# Altium PCB ACEstat.PcbDoc (part 1 of 2)
Units mil, origin at the board's own origin, x right, y up, seen from the top; angles counter-clockwise.
Board outline 1181.1 x 2005.83 mil, 4 copper layers (Top Layer, GROUND, POWER, Bottom Layer), stack 37.677 mil thick; 67 components, 85 nets, 324 pads, 246 vias.
Unrouted connection lines stored in the file: 169.
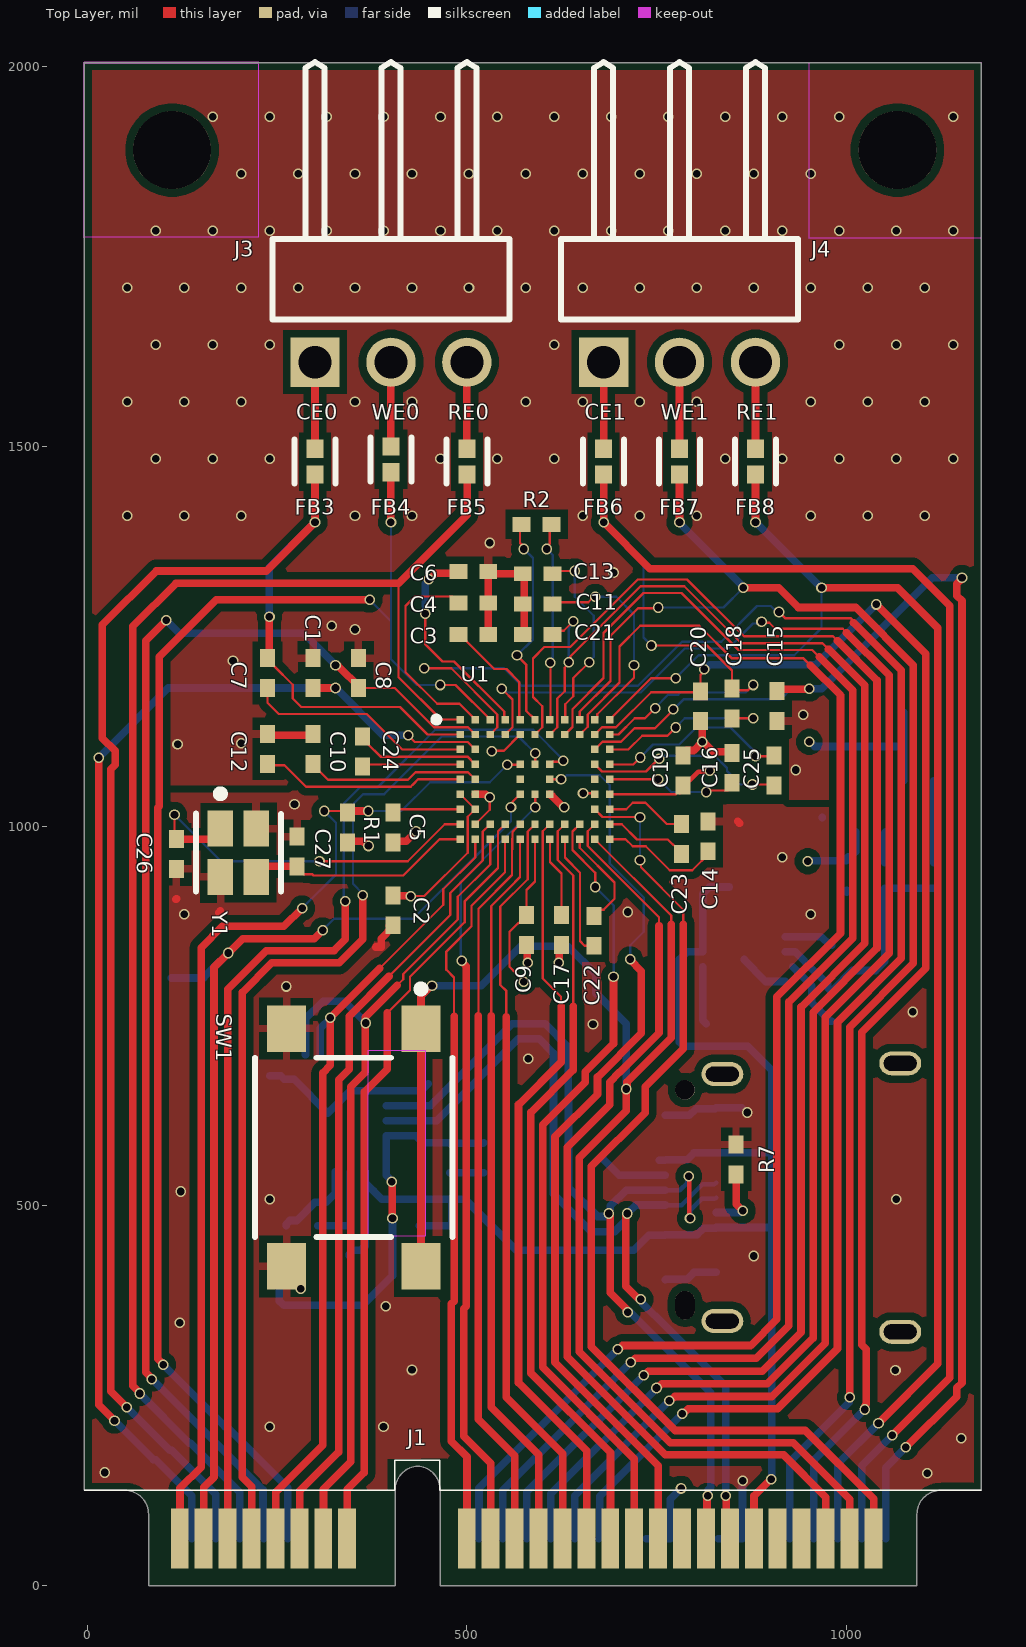
[diagram p0: Top Layer view]
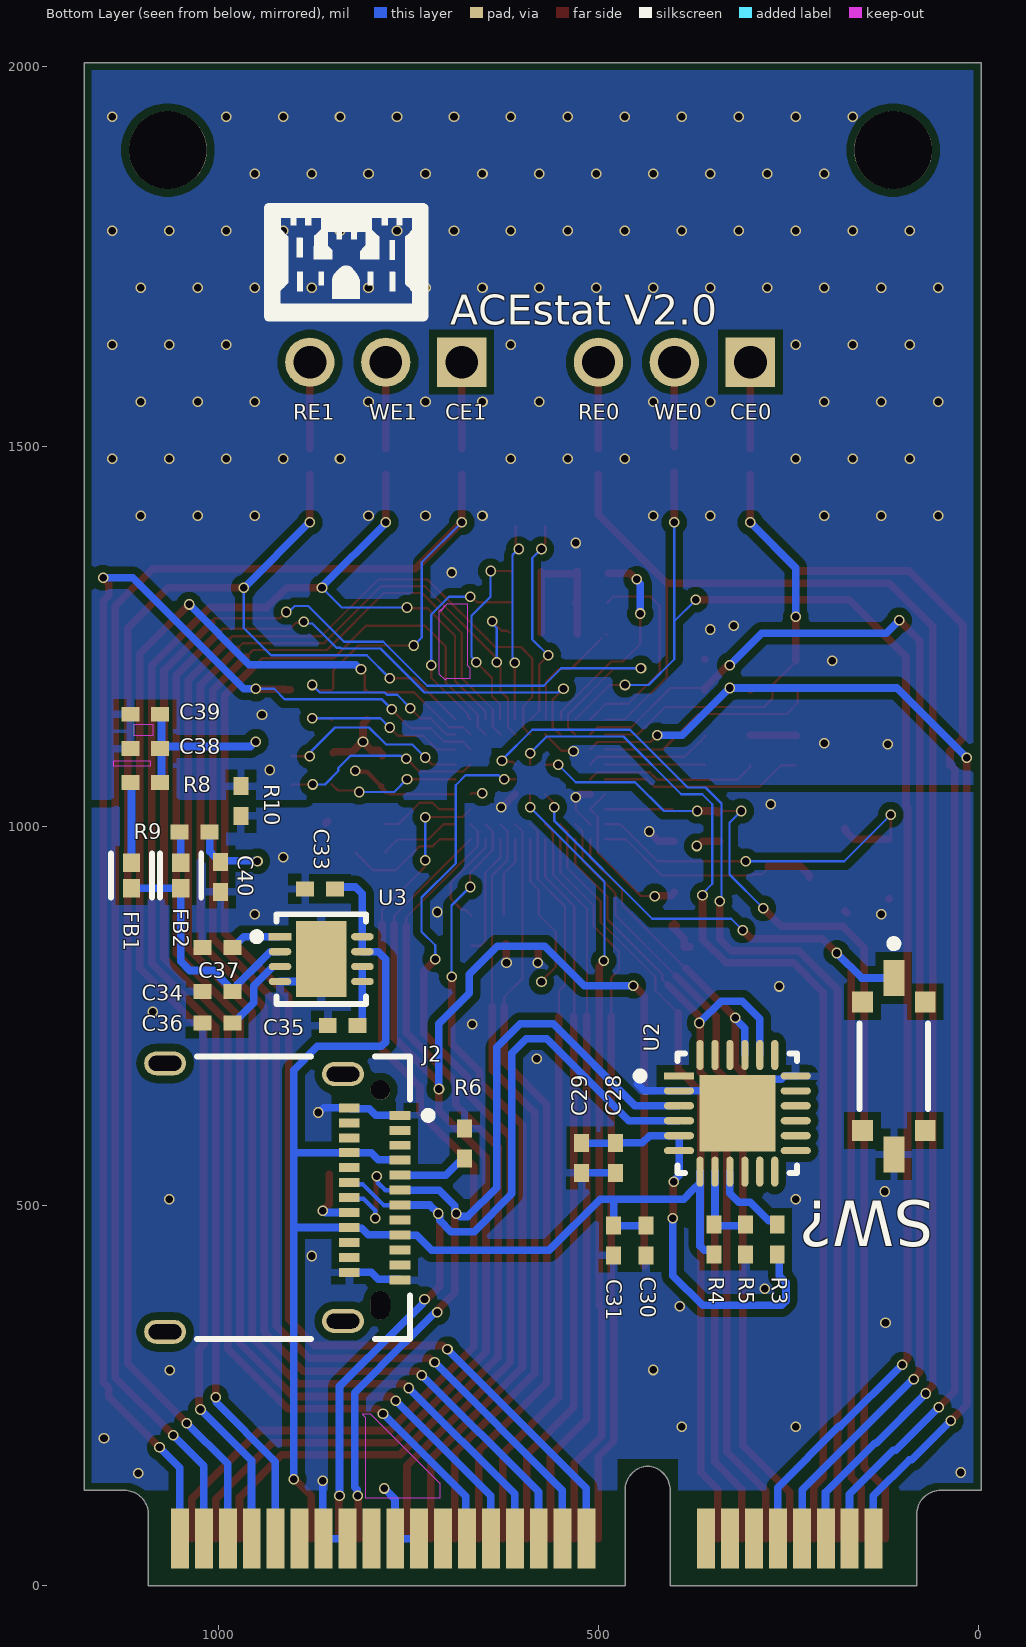
[diagram p1: Bottom Layer view, seen from below]
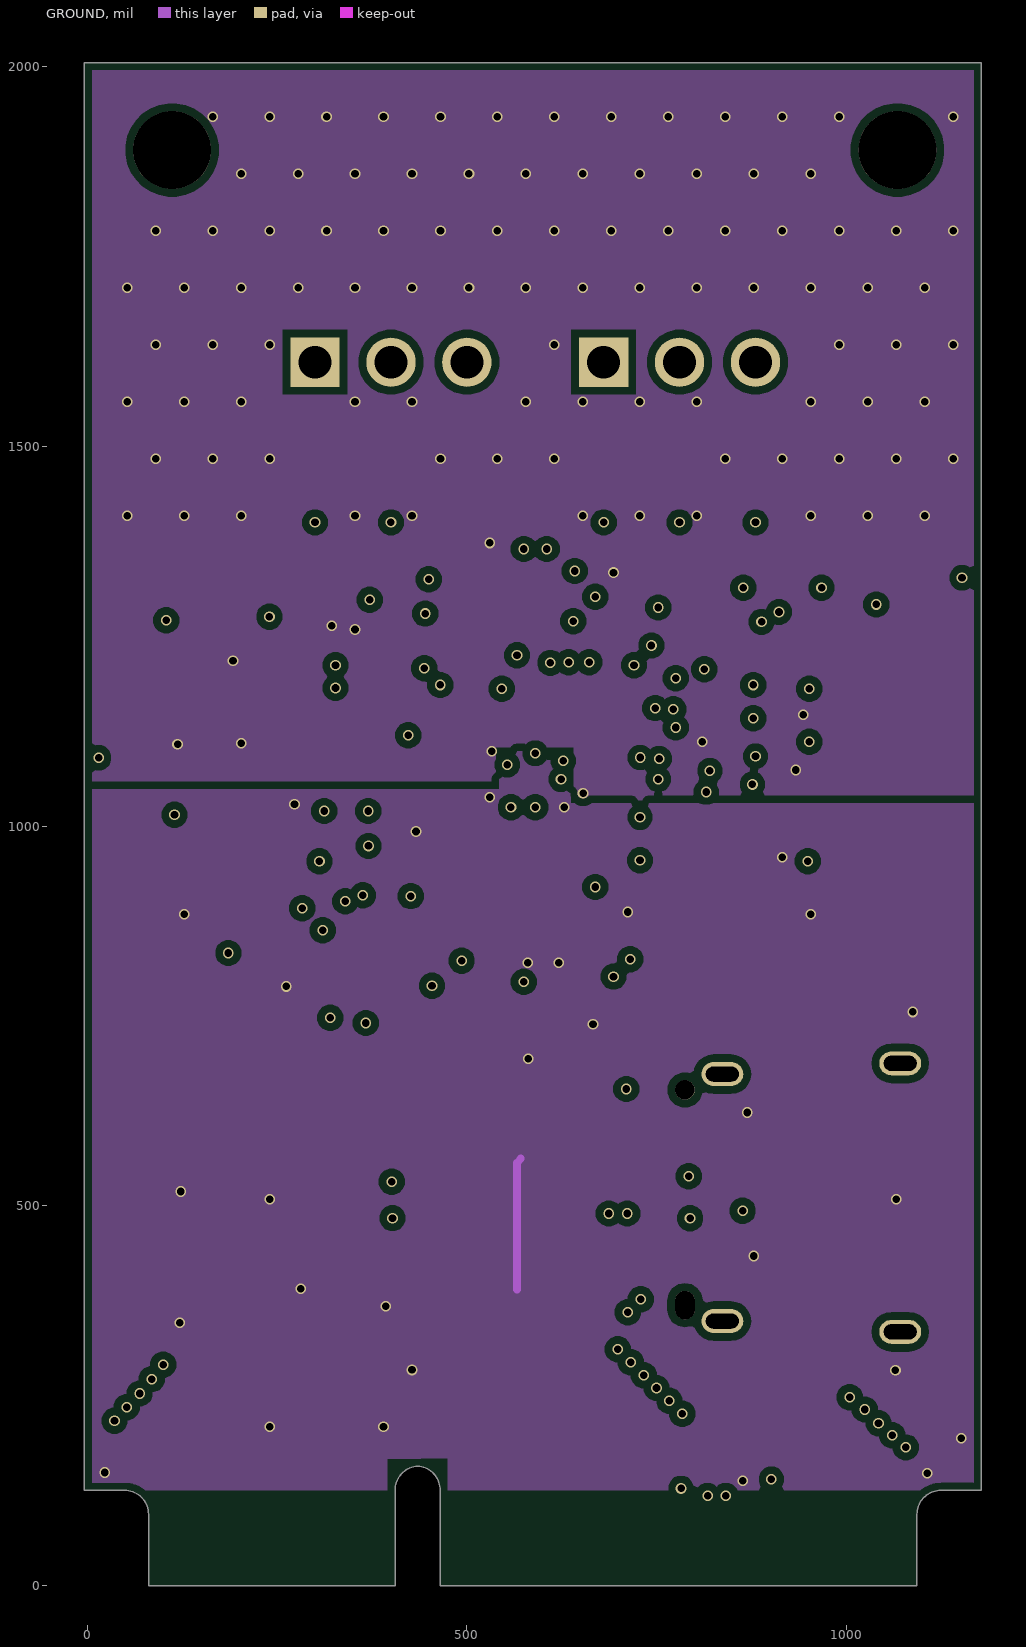
[diagram p2: GROUND]
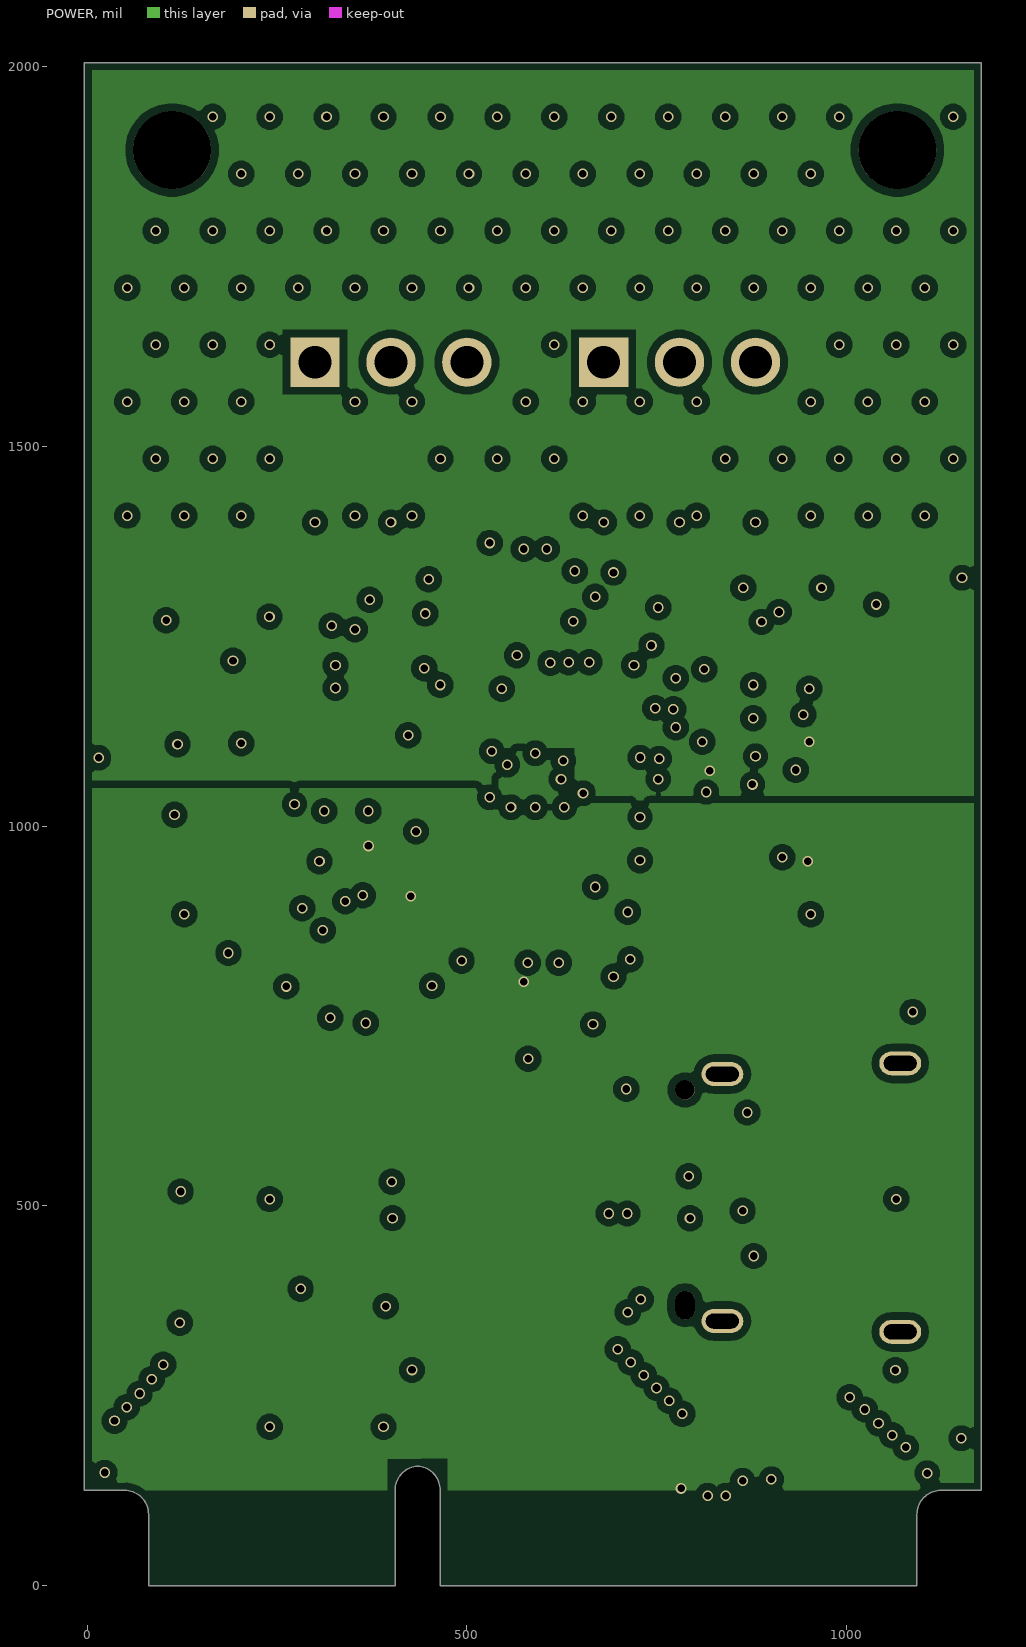
[diagram p3: POWER]

## Layer stack, top to bottom
Top Solder: solder mask 0.4, Solder Resist, Dk 3.5
Top Layer: signal copper 1.5354
Dielectric 2: prepreg 5.5118, PP-006, Dk 4.1
GROUND: signal copper 1.378
Dielectric 1: core 20.8268, FR-4, Dk 4.8
POWER: signal copper 1.378
Dielectric 3: prepreg 5.5118, PP-006, Dk 4.1
Bottom Layer: signal copper 1.5354
Bottom Solder: solder mask 0.4, Solder Resist, Dk 3.5

## Board outline
49.35,125.49 cw(c49.39,94.03) 80.86,94.08 80.86,-0.41 405.66,-0.41 405.65,125.5 405.62,125.5 cw(c436.75,126.14) 435.2,157.25 cw(c433.64,126.15) 464.77,125.5 464.74,125.5 465,-0.41 1092.67,-0.41 1092.67,93.98 cw(c1124.17,93.98) 1124.17,125.48 1177.32,125.5 1177.32,2005.42 -3.79,2005.42 -3.79,125.57

## Design rules (kind name [scope] priority, off if disabled: settings)
BoardOutlineClearance [All] p1: gap=10 ignorepadtopadclearanceinfootprint=FALSE
Clearance ADUCM355BCCZ [InComponent('J1')] p1: gap=1 ignorepadtopadclearanceinfootprint=TRUE
Clearance Keepout [IsKeepOut] p2: gap=0 ignorepadtopadclearanceinfootprint=TRUE
Clearance General [All] p3: gap=10 ignorepadtopadclearanceinfootprint=TRUE except(0: Arc-Hole Track-Hole SMDPad-Hole THPad-Hole Via-Hole Fill-Hole Poly-Hole Region-Hole Text-Hole; 3: Arc-SMDPad Track-SMDPad; 6: Arc-Arc Arc-Track Track-Track)
DiffPairsRouting [All] p1: maxlimit=10 minlimit=3 mostfreqgap=10 toplayer_minwidth=3 toplayer_maxwidth=15 toplayer_prefwidth=10 midlayer1_mingap=10 midlayer1_minwidth=15 midlayer1_maxwidth=15 midlayer1_prefwidth=15 midlayer2_mingap=10 midlayer2_minwidth=15 midlayer2_maxwidth=15 midlayer2_prefwidth=15 bottomlayer_minwidth=3 bottomlayer_maxwidth=15 bottomlayer_prefwidth=10 maxuncoupledlength=500
HoleSize [All] p1: absolutevalues=TRUE maxlimit=110 minlimit=1 maxpercent=80.000 minpercent=20.000
MinimumSolderMaskSliver Within_J1 [InComponent('J1')] p1: minsoldermaskwidth=2
MinimumSolderMaskSliver Within_U1 [InComponent('U1')] p2: minsoldermaskwidth=2
MinimumSolderMaskSliver Within_J2 [InComponent('J2')] p3: minsoldermaskwidth=2
MinimumSolderMaskSliver Within_U3 [InComponent('U3')] p4: minsoldermaskwidth=2
MinimumSolderMaskSliver Within_U2 [InComponent('U2')] p5: minsoldermaskwidth=2
MinimumSolderMaskSliver [All] p6: minsoldermaskwidth=8
PasteMaskExpansion isEdgeConnector_Paste [HasFootprint('MPCIE_CARD_EDGE')] p1: expansion=-99999 usepaste=FALSE
PasteMaskExpansion IsPad_Paste [IsPad] p2: expansion=0
PasteMaskExpansion [All] p3: expansion=0
PlaneClearance "Under U1" [InComponent('U1')] p1: clearance=0
PlaneClearance [All] p2: clearance=20
PlaneConnect [All] p1: pad.planeconnectstyle=Relief pad.reliefexpansion=20 pad.reliefentries=4 pad.reliefconductorwidth=10 pad.reliefairgap=10 via.planeconnectstyle=Direct via.reliefexpansion=20 via.reliefentries=4 via.reliefconductorwidth=10 via.reliefairgap=10
PolygonConnect [All] p1: thpad.connectstyle=Direct thpad.reliefconductorwidth=10 thpad.reliefentries=4 thpad.polygonreliefangle="90 Angle" thpad.airgapwidth=10 smdpad.connectstyle=Relief smdpad.reliefconductorwidth=10 smdpad.reliefentries=4 smdpad.polygonreliefangle="90 Angle" smdpad.airgapwidth=10 via.connectstyle=Direct via.reliefconductorwidth=10 via.reliefentries=4 via.polygonreliefangle="90 Angle" via.airgapwidth=10
RoutingVias [All] p1: holewidth=10 width=14 viastyle="Through Hole" minholewidth=10 minwidth=10 maxholewidth=20 maxwidth=20
SilkToSolderMaskClearance [IsPad] p1: minsilkscreentomaskgap=3 clearancetoexposedcopper=TRUE
SolderMaskExpansion IsPad_SolderMask [IsPad] p1: expansion=0 istentingtop=FALSE
SolderMaskExpansion [All] p2: expansion=4 istentingtop=TRUE useseparateexpansions=TRUE expansionbottom=4 istentingbottom=TRUE
UnRoutedNet [All] p1: checkbadconnections=TRUE
Width [All] p1: maxlimit=10 minlimit=3 preferedwidth=10 toplayer_prefwidth=6 midlayer1_minwidth=10 midlayer2_minwidth=10 bottomlayer_prefwidth=6 minimp=50.000000 maximp=50.000000 favimp=50.000000
22 further rules are at their usual default settings.

## Classes and differential pairs
component class USB: C28 C29 C30 C31 J2 R3 R4 R5 R6 R7 U2
component class Power: C33 C34 C35 C36 C37 C38 C39 C40 FB1 FB2 R8 R9 R10 U3
component class "Chan 1": FB6 FB7 FB8 J4
component class "Chan 0": FB3 FB4 FB5 J3
component class acestat_355: C1 C2 C3 C4 C5 C6 C7 C8 C9 C10 C11 C12 C13 C14 C15 C16 C17 C18 C19 C20 C21 C22 C23 C24 C25 C26 C27 J1 R1 R2 SW1 SW? U1 Y1
differential pair USBD: +USBD_P -USBD_N

## Components (designator, comment, footprint, x,y, rotation, side; value= is the part's Value field where it differs from the comment)
C1 "C0402C104K4RAC7867" "0402 SMD"#1 300,1200 r270 top value=0.1uF
C2 "C0402C104K4RAC7867" "0402 SMD"#1 400,891 r90 top value=0.1uF
C3 "C0402C475M7PAC7867" "0402 SMD"#1 506.72,1250 r180 top value=4.7uF
C4 "C0402C104K4RAC7867" "0402 SMD"#1 506.72,1291.51 r180 top value=0.1uF
C5 "C0402C474K9PAC7867" "0402 SMD"#1 400,1000 r90 top value=0.47uF
C6 "CL05A475KQ5NRNC" "0402 SMD"#1 506.72,1333.01 r180 top value=4.7uF
C7 "C0402C104K4RAC7867" "0402 SMD"#1 240,1200 r270 top value=0.1uF
C8 "C0402C104K4RAC7867" "0402 SMD"#1 360,1200 r270 top value=0.1uF
C9 "C0402C104K4RAC7867" "0402 SMD"#2 576,865 r90 top value=0.1uF
C10 "C0402C474K9PAC7867" "0402 SMD"#1 300,1100 r270 top value=0.47uF
C11 "C0402C104K4RAC7867" "0402 SMD"#1 595,1295 r0 top value=0.1uF
C12 "C0402C474K9PAC7867" "0402 SMD"#1 240,1100 r270 top value=0.47uF
C13 "CL05A475KQ5NRNC" "0402 SMD"#1 595,1335 r0 top value=4.7uF
C14 "C0402C474K9PAC7867" "0402 SMD"#1 820,985 r270 top value=0.47uF
C15 "C0402C104K4RAC7867" "0402 SMD"#1 906,1160 r90 top value=0.1uF
C16 "C0402C474K9PAC7867" "0402 SMD"#1 851.64,1075.19 r270 top value=0.47uF
C17 "C0402C474K9PAC7867" "0402 SMD"#1 622,865 r90 top value=0.47uF
C18 "C0402C104K4RAC7867" "0402 SMD"#1 851.64,1160 r270 top value=0.1uF
C19 "C0402C104K4RAC7867" "0402 SMD"#1 787,1071.4 r270 top value=0.1uF
C20 "C0402C104K4RAC7867" "0402 SMD"#1 805,1159.69 r90 top value=0.1uF
C21 "C0402C221K5RAC7867" "0402 SMD"#1 595,1255 r0 top value=220pF
C22 "C0402C104K4RAC7867" "0402 SMD"#1 665,864 r90 top value=0.1uF
C23 "C0402C104K4RAC7867" "0402 SMD"#1 780,985 r90 top value=0.1uF
C24 "C0402C104K4RAC7867" "0402 SMD"#1 360,1100 r90 top value=0.1uF
C25 "C0402C104K4RAC7867" "0402 SMD"#1 902,1075 r90 top value=0.1uF
C26 "CBR04C709B5GAC" "0402 SMD"#1 115,965 r90 top value=7pF
C27 "CBR04C709B5GAC" "0402 SMD"#1 279,965 r270 top value=7pF
C28 "C0402C104K4RAC7867" "0402 SMD"#1 480,565 r90 bottom value=0.1uF
C29 "CL05A475KQ5NRNC" "0402 SMD"#1 524.87,565 r90 bottom value=4.7uF
C30 "C0402C104K4RAC7867" "0402 SMD"#1 440,456.01 r90 bottom value=0.1uF
C31 "CL05A475KQ5NRNC" "0402 SMD"#1 482.51,456.01 r90 bottom value=4.7uF
C33 "C0402C106M9PAC7867" "0402 SMD"#1 865,920 r180 bottom value=10uF
C34 "C0402C106M9PAC7867" "0402 SMD"#1 1000,784.88 r180 bottom value=10uF
C35 "C0402C105K8PAC7867" "0402 SMD"#1 835,740 r180 bottom value=1uF
C36 "C0402C105K8PAC7867" "0402 SMD"#1 1000,743.37 r180 bottom value=1uF
C37 "C0402C106M9PAC7867" "0402 SMD"#1 1000,843.01 r180 bottom value=10uF
C38 "C0402C104K4RAC7867" "0402 SMD"#1 1095,1105 r180 bottom value=0.1uF
C39 "C0402C106M9PAC7867" "0402 SMD"#1 1095,1150 r180 bottom value=10uF
C40 "C0402C104K4RAC7867" "0402 SMD"#1 1000,935 r90 bottom value=0.1uF
FB1 "BLM15PD600SN1D" FP-BLM15-0_05-d0_7-IPC_B#1 1115,935 r90 bottom
FB2 "BLM15PD600SN1D" FP-BLM15-0_05-d0_7-IPC_B#1 1050,935 r90 bottom
FB3 "BLM15PD600SN1D" FP-BLM15-0_05-d0_7-IPC_B#2 300,1480 r90 top
FB4 "BLM15PD600SN1D" FP-BLM15-0_05-d0_7-IPC_B#2 400,1483.13 r90 top
FB5 "BLM15PD600SN1D" FP-BLM15-0_05-d0_7-IPC_B#2 500,1480 r90 top
FB6 "BLM15PD600SN1D" FP-BLM15-0_05-d0_7-IPC_B#2 680,1480 r90 top
FB7 "BLM15PD600SN1D" FP-BLM15-0_05-d0_7-IPC_B#2 780,1480 r90 top
FB8 "BLM15PD600SN1D" FP-BLM15-0_05-d0_7-IPC_B#2 880,1480 r90 top
J1 "mPCIE Edge Connector" MPCIE_CARD_EDGE 80.53,-0.01 r0 top
J2 "12401610E4#2A" FP-12401610E4#2A-MFG 959,511 r270 bottom
J3 "61300311021" 61300311021 400,1720 r180 top
J4 "61300311021" 61300311021 780,1720 r180 top
R1 "RC0402FR-07100KL" "0402 SMD"#1 340,1000 r90 top value=100k
R2 "RN73C1E200RBTD" "0402 SMD"#1 590,1395 r180 top value=200
R3 "RC0402FR-071KL" "0402 SMD"#1 261.99,454.27 r270 bottom value=1k
R4 "RC0402FR-0720KL" "0402 SMD"#1 345,454.27 r270 bottom value=20k
R5 "RC0402FR-0747KL" "0402 SMD"#1 303.49,454.27 r270 bottom value=47k
R6 "RC0402FR-075K1L" "0402 SMD"#1 679,584 r90 bottom value=5.1k
R7 "RC0402FR-075K1L" "0402 SMD"#1 852,563 r90 top value=5.1k
R8 "SG73P1EWTTP2R20F" "0402 SMD"#1 1095,1060 r180 bottom value=2.2
R9 "SG73P1EWTTP2R20F" "0402 SMD"#1 1030,995 r180 bottom value=2.2
R10 "RC0402FR-070RL" "0402 SMD"#1 968,1031.32 r270 bottom value=0
SW1 "B3S-1000" OMRON-B3S-1000-4_V 351,577 r270 top
SW? "CVS-01TB" FP-CVS-01TB-MFG 111,684 r180 bottom
U1 "ADUCM355BCCZ" ADUCM355BCCZ 491.26,1140.43 r0 top
U2 "CP2102N-A02-GQFN24" FP-CP2102N-A02-GQFN24R-IPC_A 317,622 r180 bottom
U3 "ADM7154ACPZ-3.3-R7" FP-CP-8-21-IPC_C 865,825 r180 bottom
Y1 "ABM10W-32.0000MHZ-7-D1X-T3" FP-ABM10W-MFG 199,965 r270 top

## Footprints (in the part's own frame and the unit in brackets; to place one, negate y for a bottom-side part, rotate by r counter-clockwise, add the part's x,y. Pads: shape width x height; smd on the part's side, far side on the other; paste and mask are expansions set on the pad)
"0402 SMD"#1 [mm] "Footprint for 0402 SMD components"
  rect 0.6x0.5 smd: 1(-0.544,-0.065) 2(0.456,-0.065)
  body extent -0.59,-0.37 0.51,0.23, height 1.3
"0402 SMD"#2 [mm] "Footprint for 0402 SMD components"
  rect 0.6x0.5 smd paste+0 mask-0.6: 1(-0.544,-0.065)
  rect 0.6x0.5 smd mask+0.025: 2(0.456,-0.065)
  body extent -0.59,-0.37 0.51,0.23, height 1.3
61300311021 [mm] "Pin Header, pitch 2.54 mm, THT, Angled, single row, 3p"
  rect 1.65x1.65 hole 1.1: 1(2.54,2.77)
  round 1.65 hole 1.1: 2(0,2.77) 3(-2.54,2.77)
  silkscreen extent -3.96,-7.27 3.96,1.35, body extent -3.81,-7.27 3.81,3.09, height 2.58
ADUCM355BCCZ [mm]
  rect 0.25x0.25 smd paste+0 mask+0.05: A1(0,0) A2(0.5,0) A3(1,0) A4(1.5,0) A5(2,0) A6(2.5,0) A7(3,0) A8(3.5,0) A9(4,0) A10(4.5,0) A11(5,0) B1(0,-0.5) B2(0.5,-0.5) B3(1,-0.5) B4(1.5,-0.5) B5(2,-0.5) B6(2.5,-0.5) B7(3,-0.5) B8(3.5,-0.5) B9(4,-0.5) B10(4.5,-0.5) B11(5,-0.5) C1(0,-1) C2(0.5,-1) C10(4.5,-1) C11(5,-1) D1(0,-1.5) D2(0.5,-1.5) D5(2,-1.5) D6(2.5,-1.5) D7(3,-1.5) D10(4.5,-1.5) D11(5,-1.5) E1(0,-2) E2(0.5,-2) E5(2,-2) E7(3,-2) E10(4.5,-2) E11(5,-2) F1(0,-2.5) F2(0.5,-2.5) F5(2,-2.5) F6(2.5,-2.5) F7(3,-2.5) F10(4.5,-2.5) F11(5,-2.5) G1(0,-3) G2(0.5,-3) G10(4.5,-3) G11(5,-3) H1(0,-3.5) H2(0.5,-3.5) H3(1,-3.5) H4(1.5,-3.5) H5(2,-3.5) H6(2.5,-3.5) H7(3,-3.5) H8(3.5,-3.5) H9(4,-3.5) H10(4.5,-3.5) H11(5,-3.5) J1(0,-4) J2(0.5,-4) J3(1,-4) J4(1.5,-4) J5(2,-4) J6(2.5,-4) J7(3,-4) J8(3.5,-4) J9(4,-4) J10(4.5,-4) J11(5,-4)
  silkscreen extent -0.9,-0.1 -0.7,0.1, body extent -0.5,-4.5 5.5,0.5, height 0.25
FP-12401610E4#2A-MFG [mm]
  rrect100% 0.8x1.4 hole 1.1 slot 0.5 at 0 deg paste-1000 mask+0: 1(-4.13,3.115) 2(4.13,3.115) 3(-4.49,-2.835) 4(4.49,-2.835)
  rect 0.3x0.7 smd paste+0 mask+0: A1(-2.75,5.025) A2(-2.25,5.025) A3(-1.75,5.025) A4(-1.25,5.025) A5(-0.75,5.025) A6(-0.25,5.025) A7(0.25,5.025) A8(0.75,5.025) A9(1.25,5.025) A10(1.75,5.025) A11(2.25,5.025) A12(2.75,5.025) B1(2.5,3.325) B2(2,3.325) B3(1.5,3.325) B4(1,3.325) B5(0.5,3.325) B6(0,3.325) B7(-0.5,3.325) B8(-1,3.325) B9(-1.5,3.325) B10(-2,3.325) B11(-2.5,3.325) B12(-3,3.325)
  round 0.65 hole 0.65 unplated paste-1000 mask+0: ""(-3.6,4.365)
  rrect100% 0.95x0.65 hole 0.65 slot 0.95 at 0 deg unplated paste-1000 mask+0: ""(3.6,4.365)
  silkscreen extent -4.72,-1.76 4.72,6.09, body extent -4.6,-5.23 4.6,5.33, height 3.43
FP-ABM10W-MFG [mm]
  rect 1.2x0.85 smd: 1(-0.813,-0.6) 2(0.813,-0.6) 3(0.813,0.6) 4(-0.813,0.6)
  silkscreen extent -2.1,-1.42 1.3,1.43, body extent -1.51,-1.15 1.51,1.15, height 0.25
FP-BLM15-0_05-d0_7-IPC_B#1 [mil]
  rect 24.23x22.54 smd paste+0 mask+0: 1(-16.87,0) 2(16.87,0)
  silkscreen extent -29,-27 29,27, body extent -20,-10 20,10, height 22
FP-BLM15-0_05-d0_7-IPC_B#2 [mil]
  rect 24.23x22.54 smd paste+0: 1(-16.87,0) 2(16.87,0)
  silkscreen extent -29,-27 29,27, body extent -35,-17 35,17, height 10
FP-CP2102N-A02-GQFN24R-IPC_A [mm]
  rect 1.01x0.239 smd paste+0 mask+0: 1(-1.951,1.25)
  rrect100% 1.01x0.239 smd paste+0 mask+0: 2(-1.951,0.75) 3(-1.951,0.25) 4(-1.951,-0.25) 5(-1.951,-0.75) 6(-1.951,-1.25) 13(1.951,-1.25) 14(1.951,-0.75) 15(1.951,-0.25) 16(1.951,0.25) 17(1.951,0.75) 18(1.951,1.25)
  rrect100% 0.239x1.01 smd paste+0 mask+0: 7(-1.25,-1.951) 8(-0.75,-1.951) 9(-0.25,-1.951) 10(0.25,-1.951) 11(0.75,-1.951) 12(1.25,-1.951) 19(1.25,1.951) 20(0.75,1.951) 21(0.25,1.951) 22(-0.25,1.951) 23(-0.75,1.951) 24(-1.25,1.951)
  rect 2.55x2.55 smd paste-1000 mask+0: 25(0,0)
  silkscreen extent -3.38,-2 2,2, body extent -2,-2 2,2, height 0.8
FP-CP-8-21-IPC_C [mm]
  rect 0.756x0.242 smd paste+0 mask+0: 1(-1.378,0.75)
  rrect100% 0.756x0.242 smd paste+0 mask+0: 2(-1.378,0.25) 3(-1.378,-0.25) 4(-1.378,-0.75) 5(1.378,-0.75) 6(1.378,-0.25) 7(1.378,0.25) 8(1.378,0.75)
  rect 1.7x2.54 smd paste-1000 mask+0: 9(0,0)
  silkscreen extent -2.28,-1.5 1.5,1.5, body extent -1.5,-1.5 1.5,1.5, height 0.8
FP-CVS-01TB-MFG [mm]
  rect 0.7x1.2 smd paste+0 mask+0: 1(0,2.95) 2(0,-2.95)
  rect 0.7x0.7 smd paste+0 mask+0: 3(-1.05,2.15) 4(1.05,2.15) 5(-1.05,-2.15) 6(1.05,-2.15)
  silkscreen extent -1.15,-1.43 1.15,4.22, body extent -1,-3.05 1,3.05, height 1.75
MPCIE_CARD_EDGE [mm] "Based on https://www.te.com/commerce/DocumentDelivery/DDEController?Action=srchrtrv&DocNm=1775838&DocType=Customer+Drawing&DocLang=English"
  rect 0.6x2 smd: 1(1.05,1.575) 3(1.85,1.575) 5(2.65,1.575) 7(3.45,1.575) 9(4.25,1.575) 11(5.05,1.575) 13(5.85,1.575) 15(6.65,1.575) 17(10.65,1.575) 19(11.45,1.575) 21(12.25,1.575) 23(13.05,1.575) 25(13.85,1.575) 27(14.65,1.575) 29(15.45,1.575) 31(16.25,1.575) 33(17.05,1.575) 35(17.85,1.575) 37(18.65,1.575) 39(19.45,1.575) 41(20.25,1.575) 43(21.05,1.575) 45(21.85,1.575) 47(22.65,1.575) 49(23.45,1.575) 51(24.25,1.575)
  rect 0.6x2 smd far side: 2(1.45,1.575) 4(2.25,1.575) 6(3.05,1.575) 8(3.85,1.575) 10(4.65,1.575) 12(5.45,1.575) 14(6.25,1.575) 16(7.05,1.575) 18(11.05,1.575) 20(11.85,1.575) 22(12.65,1.575) 24(13.45,1.575) 26(14.25,1.575) 28(15.05,1.575) 30(15.85,1.575) 32(16.65,1.575) 34(17.45,1.575) 36(18.25,1.575) 38(19.05,1.575) 40(19.85,1.575) 42(20.65,1.575) 44(21.45,1.575) 46(22.25,1.575) 48(23.05,1.575) 50(23.85,1.575) 52(24.65,1.575)
  silkscreen extent -2.15,3.2 27.85,4.2
OMRON-B3S-1000-4_V [mm] "SMD, 4-Leads, Body 6.6x6mm"
  rect 1.55x1.3 smd: 1(-3.975,2.25) 2(3.975,2.25) 4(3.975,-2.25)
  rect 1.55x1.3 smd mask+0: 3(-3.975,-2.25)
  silkscreen extent -5.42,-3.3 3,3.3, body extent -4.5,-3.3 4.5,3.3, height 4.4

## Part data
C1 C2 C4 C7 C8 C9 C11 C15 C18 C19 C20 C22 C23 C24 C25 C28 C30 C38 C40: "0.1 µF ±10% 16V Ceramic Capacitor X7R 0402 (1005 Metric) Kemet"
C3: "4.7 µF ±20% 4V Ceramic Capacitor X5R 0402 (1005 Metric) (1005 Metric) Kemet"
C5 C10 C12 C14 C16 C17: "0.47 µF ±10% 6.3V Ceramic Capacitor X5R 0402 (1005 Metric) Kemet"
C6 C13 C29 C31: "4.7 µF ±10% 6.3V Ceramic Capacitor X5R 0402 (1005 Metric) Samsung"
C21: "220 pF ±10% 50V Ceramic Capacitor X7R 0402 (1005 Metric)Kemet"
C26 C27: "7 pF ±0.1pF 50V Ceramic Capacitor C0G, NP0 0402 (1005 Metric) Kemet"
C33 C34 C37 C39: "10 µF ±20% 6.3V Ceramic Capacitor X5R 0402 (1005 Metric) (1005 Metric) Kemet"
C35 C36: "1 µF ±10% 10V Ceramic Capacitor X5R 0402 (1005 Metric)"
FB1 FB2 FB3 FB4 FB5 FB6 FB7 FB8: library part CMP-0686-00129-3, "Chip Ferrite Bead, 0402, 60Ω @ 100MHz, 0.06Ω, 25%, 1.7A", Case Code (Imperial)=0402, Case Code (Metric)=1005, Current Rating=1.7A, DC Resistance (DCR)=60mR, DC Resistance-Max=60MR, Max Operating Temperature=125°C, Min Operating Temperature=-55°C, Package Quantity=1, Test Frequency=100MHz, Tolerance=25%, Case/Package=0402, Core Material=Ferrite, DC Current=1.7A, Depth=0.55mm, Height=0.5mm, Impedance=60R, Lead Free="Lead Free", Length=1mm, Material=Steel, Max Current Rating=1.7A, Max DC Current=1.7A, Military Standard=Not, Number of Circuits=1, Number of Lines=1, Number of Pins=2, Packaging="Tape and Reel", Radiation Hardening=No, REACH SVHC="No SVHC", RoHS Compliant=Yes, Series=BLM15PD, Termination=SMD/SMT, Width=0.5mm
J1: library part mPCIE_Edge
J2: library part CMP-02355-000003-1, "CONN RCP USB3.1 TYPEC 24P SMD RA", Connector Type=USB, Gender=Receptacle, Mount="Surface Mount", Number of Contacts=24, Number of Pins=24, Packaging="Cut Tape"
J3 J4: library part CMP-1502-01061-1, "THT Angled Pin Header WR-PHD, Pitch 2.54 mm, Single Row, 3 pins", Contact Resistance=20mOhm, Manufacturer="Wurth Elektronik", Operating Temperature=-40to105degC, Rated Current=3A, Withstanding Voltage=500VAC, Working Voltage=250VAC, Datasheet URL=https://katalog.we-online.de/em/datasheet/6130xx11021.pdf, Gender=Male, Manufacturer URL=http://www.we-online.de, Mounting Technology=THT, Orientation=Angled, Package Reference=61300311021, Packaging=Bag, Part Number=61300311021, Pin Number=3, Pitch=2.54mm, Publisher=WurthElektronik, Row Number=Single
R1: "100 kOhms ±1% 0.063W, 1/16W Chip Resistor 0402 (1005 Metric) Moisture Resistant Thick Film"
R2: "200 Ohms ±0.1% 0.063W, 1/16W Chip Resistor 0402 (1005 Metric) Thin Film"
R3: "1 kOhms ±1% 0.063W, 1/16W Chip Resistor 0402 (1005 Metric) Moisture Resistant Thick Film"
R4: "20 kOhms ±1% 0.063W, 1/16W Chip Resistor 0402 (1005 Metric) Moisture Resistant Thick Film"
R5: "47 kOhms ±1% 0.063W, 1/16W Chip Resistor 0402 (1005 Metric) Moisture Resistant Thick Film"
R6 R7: "5.1 kOhms ±1% 0.063W, 1/16W Chip Resistor 0402 (1005 Metric) Moisture Resistant Thick Film"
R8 R9: "2.2 Ohms ±1% 0.25W, 1/4W Chip Resistor 0402 (1005 Metric) Automotive AEC-Q200, Pulse Withstanding Thick Film"
R10: "0 Ohms Jumper 0.063W, 1/16W Chip Resistor 0402 (1005 Metric) Moisture Resistant Thick Film"
SW1: library part CMP-1677-00001-4, "Sealed Tactile Switch, SPST-NO, 3 to 24 V, -25 to 70 degC, 4-Pin SMD, RoHS, Bulk", Current Rating="50 mA", Manufacturer=Omron, Max Operating Temperature="70 degC", Min Operating Temperature="-25 degC", Package Quantity=1500, Voltage Rating="24 V", ComponentLink1Description="Manufacturer URL", ComponentLink1URL=http://www.omron.com/, ComponentLink2Description=Datasheet, ComponentLink2URL=http://www.omron.com/ecb/products/pdf/en-b3s.pdf, Contact Plating=Silver, DatasheetVersion=10/2014, Height="4.3 mm", Length="6.6 mm", Mount="Surface Mount", Mounting Technology="Surface Mount", PackageDescription="4-Pin Surface Mount Device, Body 6.6 x 6 mm", PackageReference=B3S-1000, Packaging=Bulk, REACH SVHC="No SVHC", RoHSCompliant=true
SW?: library part CMP-011-00013-1, "Switch Slide OFF ON SPST Recessed Slide 0.1A 24VDC Gull Wing SMD Embossed T/R"
U1: "ARM® Cortex®-M3 ADuCM Microcontroller IC 32-Bit 26MHz 128KB _128K x 8_ FLASH 72-LGA _6x6_", Package="VFLGA-72 Analog Devices Inc.", Supplier Part Number 1=505-ADUCM355BCCZ-ND, Digi-Key_Part_Number=ADUCM355BCCZ-RL7-ND, Digi-Key_Purchase_URL=https://www.digikey.com/product-detail/en/analog-devices-inc/ADUCM355BCCZ-RL7/ADUCM355BCCZ-RL7-ND/9996949?utm_source=snapeda&utm_medium=aggregator&utm_campaign=symbol, MF="Analog Devices", MP=ADUCM355BCCZ, SnapEDA_Link=https://www.snapeda.com/parts/ADUCM355BCCZ/Analog%20Devices%20Inc./view-part/3616453/?ref=snap, Supplier 1=Digi-Key
U2: library part CP2102N, "IC USB TO UART BRIDGE QFN24"
U3: library part CMP-09138-000115-1, "IC REG LINEAR 3.3V 600MA 8LFCSP", Dropout Voltage=120mV, Max Input Voltage=5.5V, Max Operating Temperature=125°C, Max Output Current=600mA, Min Current Limit=700mA, Min Input Voltage=2.3V, Min Operating Temperature=-40°C, Nominal Output Voltage=3.3V, Quiescent Current=4mA, Accuracy=0.5%, Contact Plating=Tin, Lead Free="Contains Lead", Mount="Surface Mount", Number of Outputs=1, Number of Pins=8, Number of Regulators=1, Output Current=600mA, Output Type=Fixed, Output Voltage=3.3V, Packaging="Cut Tape", Polarity=Positive, REACH SVHC="No SVHC", RoHS Compliant=Yes
Y1: library part CMP-27762-001052-1, "Crystal 32MHz ±10ppm 7pF SMD-4 2.5mm x 2mm"

## Free pads (board coordinates)
  round 102.36 hole 102.36 unplated: Mount(111.85,1890.35) Mount(1066.93,1890.35)

## Via types
v1: diameter 14, hole 10, Top Layer to Bottom Layer, tented both sides, 246 vias

## Nets (pads, with @x,y where several pads share a name; then routed paths per layer and width w, separated by ;. In a path a pad name is that pad's centre, name@x,y a point inside that pad or via, vN(x,y) a via of type N, cw(c..) or ccw(c..) an arc to the next point about the centre after c; other vN are vias at no path point)
3V3: C34.2 FB1.1 FB2.1 U3.2 | length 331.6
  Bottom Layer w10: U3.2@919.25,834.84 919.48,834.62 932.08,834.62 958.14,808.56 958.6,808.56 975.24,791.92 975.24,787.15 980.08,782.31 C34.2@982.05,782.31 ; C34.2@982.28,784.88 1007.41,810 1038,810 1050,822 FB2.1@1050,918.13 FB1.1@1115,918.13
5VUSB: C30.2 C31.2 C33.2 J1.41 J2.A4 J2.A9 J2.B4 J2.B9 R4.2 U2.7 U3.7 U3.8 | length 1961.2
  Top Layer w10: J1.41@878.1,62.01 878.1,118.1 900,140 v1(901,140)
  Bottom Layer w10: R4.2@345,434.59 345,436.55 349.84,441.4 360.35,441.4 366.21,447.25 U2.7@366.21,530.59 ; U2.7@366.21,545.18 U2.7@366.21,530.59 ; C30.2@437.43,473.96 C31.2@479.94,473.96 479.94,508.94 480,509 ; J2.A4@753.29,560.21 J2.A4@761.17,560.21 761.85,560.9 789.95,560.9 799.1,570.06 J2.B9@828.09,570.06 901.37,570.06 ; J2.B4@827.41,470.94 827.19,470.72 811.91,470.72 802.97,461.79 J2.A9@761.17,461.79 760.91,461.53 739.53,461.53 719.43,441.43 565.07,441.43 497.5,509 480,509 ; J2.B4@828.09,471.63 900.37,471.63 901.37,470.63 ; C33.2@845.31,920 820,920 810.75,910.75 U3.8@810.75,854.53 U3.7@810.75,834.84 789.84,834.84 780,825 780,715.86 785.86,710 870,710 901.37,678.63 901.37,570.06 ; v1(901,140) 901.37,140.37 901.37,471.63 901.37,570.06 ; U2.7@366.21,530.59 377,519.81 387.81,509 480,509
ADC_VBIAS_CAP: C16.2 U1.E11 | length 174.8
  Top Layer w3: U1.E11@688.11,1061.69 688.43,1062 v1(752,1062) ; v1(815,1045) 816.93,1046.93 843.07,1046.93 C16.2@851.48,1055.34
  Bottom Layer w3: v1(752,1062) 769,1045 v1(815,1045)
AGND: C1.1 C3.1 C4.1 C6.1 C8.1 C10.1 C11.1 C12.1 C13.1 C15.1 C16.1 C19.1 C20.1 C21.1 C38.1 C39.1 R10.1 U1.B5 U1.F10 | length 443.9
  Top Layer w3: v1(532.87,1098.82) 533.55,1099.5 548.76,1099.5 U1.B5@570,1120.74 U1.B5@570,1121 ; v1(652.97,1043.42) 667,1043.42 U1.F10@668.43,1042
  Top Layer w10: C12.1@239.54,1119.22 240,1119.68 C10.1@300,1119.68 ; C3.1@528.14,1252.57 C4.1@528.14,1294.07 ; C4.1@529.69,1294.07 528.14,1295.62 C6.1@528.14,1335.58 531.28,1332.43 C13.1@573.58,1332.43 ; C21.1@575.32,1255 575.32,1295 C13.1@575.32,1335 ; C19.1@784.43,1092.82 784.43,1094.79 789.27,1099.63 798.44,1099.63 v1(810,1111.19) ; C20.1@805,1140 809.84,1135.16 809.84,1127.49 810,1127.33 v1(810,1111.19) ; C16.1@849.07,1096.61 847.64,1098.04 824.23,1098.04 811.08,1111.19 v1(810,1111.19)
  other v1: 933,1074 119,1108 202.71,1109.02 943,1147 192,1218 352.71,1259.02 322,1264 693,1334 530,1373 52.71,1409.02 127.71,1409.02 202.71,1409.02 352.71,1409.02 427.71,1409.02 652.71,1409.02 727.71,1409.02 802.71,1409.02 952.71,1409.02 1027.71,1409.02 1102.71,1409.02 90.21,1484.02 165.21,1484.02 240.21,1484.02 465.21,1484.02 540.21,1484.02 615.21,1484.02 840.21,1484.02 915.21,1484.02 990.21,1484.02 1065.21,1484.02 1140.21,1484.02 52.71,1559.02 127.71,1559.02 202.71,1559.02 352.71,1559.02 427.71,1559.02 577.71,1559.02 652.71,1559.02 727.71,1559.02 802.71,1559.02 952.71,1559.02 1027.71,1559.02 1102.71,1559.02 90.21,1634.02 165.21,1634.02 240.21,1634.02 615.21,1634.02 990.21,1634.02 1065.21,1634.02 1140.21,1634.02 52.71,1709.02 127.71,1709.02 202.71,1709.02 277.71,1709.02 352.71,1709.02 427.71,1709.02 502.71,1709.02 577.71,1709.02 652.71,1709.02 727.71,1709.02 802.71,1709.02 877.71,1709.02 952.71,1709.02 1027.71,1709.02 1102.71,1709.02 90.21,1784.02 165.21,1784.02 240.21,1784.02 315.21,1784.02 390.21,1784.02 465.21,1784.02 540.21,1784.02 615.21,1784.02 690.21,1784.02 765.21,1784.02 840.21,1784.02 915.21,1784.02 990.21,1784.02 1065.21,1784.02 1140.21,1784.02 202.71,1859.02 277.71,1859.02 352.71,1859.02 427.71,1859.02 502.71,1859.02 577.71,1859.02 652.71,1859.02 727.71,1859.02 802.71,1859.02 877.71,1859.02 952.71,1859.02 165.21,1934.02 240.21,1934.02 315.21,1934.02 390.21,1934.02 465.21,1934.02 540.21,1934.02 615.21,1934.02 690.21,1934.02 765.21,1934.02 840.21,1934.02 915.21,1934.02 990.21,1934.02 1140.21,1934.02
AIN0: J1.18 U1.B9 | length 1884.6
  Top Layer w3: U1.B9@648.74,1120.74 659,1131 659,1147.21 701,1189.21 701,1236.65 728.35,1264 806,1264 849,1221 943.12,1221 951.94,1212.18
  Top Layer w10: v1(698.8,311.14) 699.88,311.14 704.91,316.17 873.47,316.17 908,350.7 908,775.14 992,859.14 992,1172.12 951.94,1212.18
  Bottom Layer w10: J1.18@515.9,62.01 515.9,128.24 v1(698.8,311.14)
AIN1: J1.20 U1.B8 | length 1959.2
  Top Layer w3: U1.B8@629.06,1120.74 639,1130.69 639,1154 680,1195 680,1254.54 732.46,1307 782.54,1307 857.54,1232 954.75,1232 963.88,1222.88
  Top Layer w10: v1(715.77,294.17) 716.85,294.17 721.88,299.2 881.06,299.2 924,342.13 924,768.51 1008,852.51 1008,1178.75 963.88,1222.88
  Bottom Layer w10: J1.20@547.39,62.01 547.39,125.79 v1(715.77,294.17)
AIN2: J1.24 U1.B6 | length 2050.5
  Top Layer w3: U1.B6@589.69,1120.74 599.11,1130.16 599.11,1157.89 587,1170 587,1221 602,1236 636,1236 725,1325 790,1325 865,1250 982.01,1250 988,1244
  Top Layer w10: v1(749.71,260.22) 750.79,260.22 756.38,265.81 895.7,265.81 956,326.11 956,755.25 1040,839.25 1040,1192.01 988,1244
  Bottom Layer w10: J1.24@610.39,62.01 610.39,120.9 v1(749.71,260.22)
AIN3: C21.2 J1.22 U1.B7 | length 2075.4
  Top Layer w3: U1.B7@609.37,1120.74 619,1130.37 619,1168 628.8,1177.8 628.8,1208.74 634,1213.94 v1(634,1216) 636.1,1218.1 636.1,1223.38 728.73,1316 786.27,1316 861.27,1241 968.38,1241 976.19,1233.19 ; C21.2@617.49,1255 619.99,1257.5 627.5,1257.5 v1(640,1270)
  Top Layer w10: v1(732.74,277.2) 733.82,277.2 738.85,282.22 888.66,282.22 940,333.56 940,761.88 1024,845.88 1024,1185.38 976.19,1233.19
  Bottom Layer w3: v1(634,1216) 634,1261.02 640,1267.02 v1(640,1270)
  Bottom Layer w10: J1.22@578.89,62.01 578.89,123.35 v1(732.74,277.2)
AIN5: J1.26 U1.B4 | length 2034.7
  Top Layer w3: v1(546,1181) 549,1181 v1@550,1180 ; v1@548.5,1178.5 560,1167 560,1130.43 U1.B4@550.31,1120.74 ; v1(888,1269) 889.13,1267.87 898.13,1267.87 906,1260 995,1260 999.82,1255.18 999.82,1254.82
  Top Layer w10: v1(766.68,243.25) 767.76,243.25 773.51,249 901.51,249 972,319.49 972,748.63 1056,832.63 1056,1198.63 999.82,1254.82
  Bottom Layer w3: v1(546,1181) 548.26,1181 553.26,1176 729,1176 787,1234 838.73,1234 839.73,1235 845,1235 876.9,1266.9 885.9,1266.9 v1(888,1269)
  Bottom Layer w10: J1.26@641.88,62.01 641.88,118.46 v1(766.68,243.25)
AIN6: J1.28 U1.B3 | length 2249.9
  Top Layer w3: v1(444,1208) 479.26,1208 540.05,1147.21 540.05,1133.59 540.05,1130.16 534.05,1124.16 U1.B3@530.63,1120.74 ; v1(911,1282) 919,1274 1005,1274 1009.13,1269.87 1009.13,1268.13
  Top Layer w10: v1(783.65,226.28) 784.73,226.28 791.45,233 909,233 988,312 988,742 1072,826 1072,1205.26 1009.13,1268.13
  Bottom Layer w3: v1(444,1208) 549,1208 572,1185 725.27,1185 783.27,1243 835,1243 882,1290 900.02,1290 908.02,1282 v1(911,1282) v1@908.64,1279.64
  Bottom Layer w10: J1.28@673.38,62.01 674.83,63.46 674.83,117.46 v1(783.65,226.28)
AVDD: C19.2 C38.2 C39.2 R8.2 U1.F11 | length 365.3
  Top Layer w3: U1.F11@688.11,1042 768.95,1042 769,1042.05 775,1042.05 777.82,1044.87 C19.2@780.16,1044.87
  Top Layer w6: C19.2@780.16,1044.87 787,1051.72 C19.2@787,1053.68 ; C19.2@784.43,1053.45 786.77,1053.45 C19.2@787,1053.68 ; v1(820,1073) 818.47,1071.47 804.79,1071.47 C19.2@787,1053.68
  Bottom Layer w10: v1(951,1111) 952.08,1111 958.08,1105 C38.2@1075.31,1105 ; R8.2@1075.31,1060 C38.2@1075.31,1105 ; C39.2@1075.31,1150 1075.31,1109 C38.2@1075.31,1105
AVDD_REG: C12.2 U1.E1 | length 267
  Top Layer w3: C12.2@240,1080.31 259.69,1080.31 288,1052 426,1052 429,1055 429.09,1055 435.78,1061.69 U1.E1@491.26,1061.69
BM/P1.1: J1.1 R1.2 U1.D5 | length 1379.2
  Top Layer w3: v1(312,1020) 339.69,1020 R1.2@340,1019.69 ; v1(553,1081) 569.63,1081 U1.D5@570,1081.37
  Top Layer w10: J1.1@122.2,62.01 122.2,128.2 150,156 150,840 178,868 259,868 v1(283,892) ; R1.2@340,1019.69 R1.2@340.34,1019.34 ; R1.2@342.57,1017.95 344.62,1020 v1(370,1020)
  Bottom Layer w3: v1(283,892) 327.5,936.5 327.5,1004.5 v1(312,1020) ; v1(370,1020) 413.69,1020 451.69,1058 530,1058 v1(553,1081)
CAP_POT0: C7.2 U1.C1 | length 298.8
  Top Layer w3: C7.2@237.43,1182.05 237.43,1162.57 252.14,1147.86 368.14,1147.86 414.94,1101.06 U1.C1@491.26,1101.06
CAP_POT1: C18.2 U1.C11 | length 232.4
  Top Layer w3: U1.C11@688.11,1101.06 712.57,1101.06 730.76,1119.24 764.24,1119.24 v1(775,1130) ; C18.2@851.33,1140 853.33,1142 v1(877,1142)
  Bottom Layer w3: v1(775,1130) 787,1142 v1(877,1142)
CC1: J2.A5 R6.1 | length 93.2
  Bottom Layer w10: R6.1@679,564.31 679,562.35 700.82,540.53 J2.A5@761.17,540.53
CC2: J2.B5 R7.1 | length 87.3
  Top Layer w10: R7.1@854.57,541.58 854.57,502.06 v1(863,493.63)
  Bottom Layer w10: J2.B5@828.09,491.31 859.6,491.31 861.92,493.63 v1(863,493.63)